# EAGLE board Project1 (EAGLE 9.3.0)
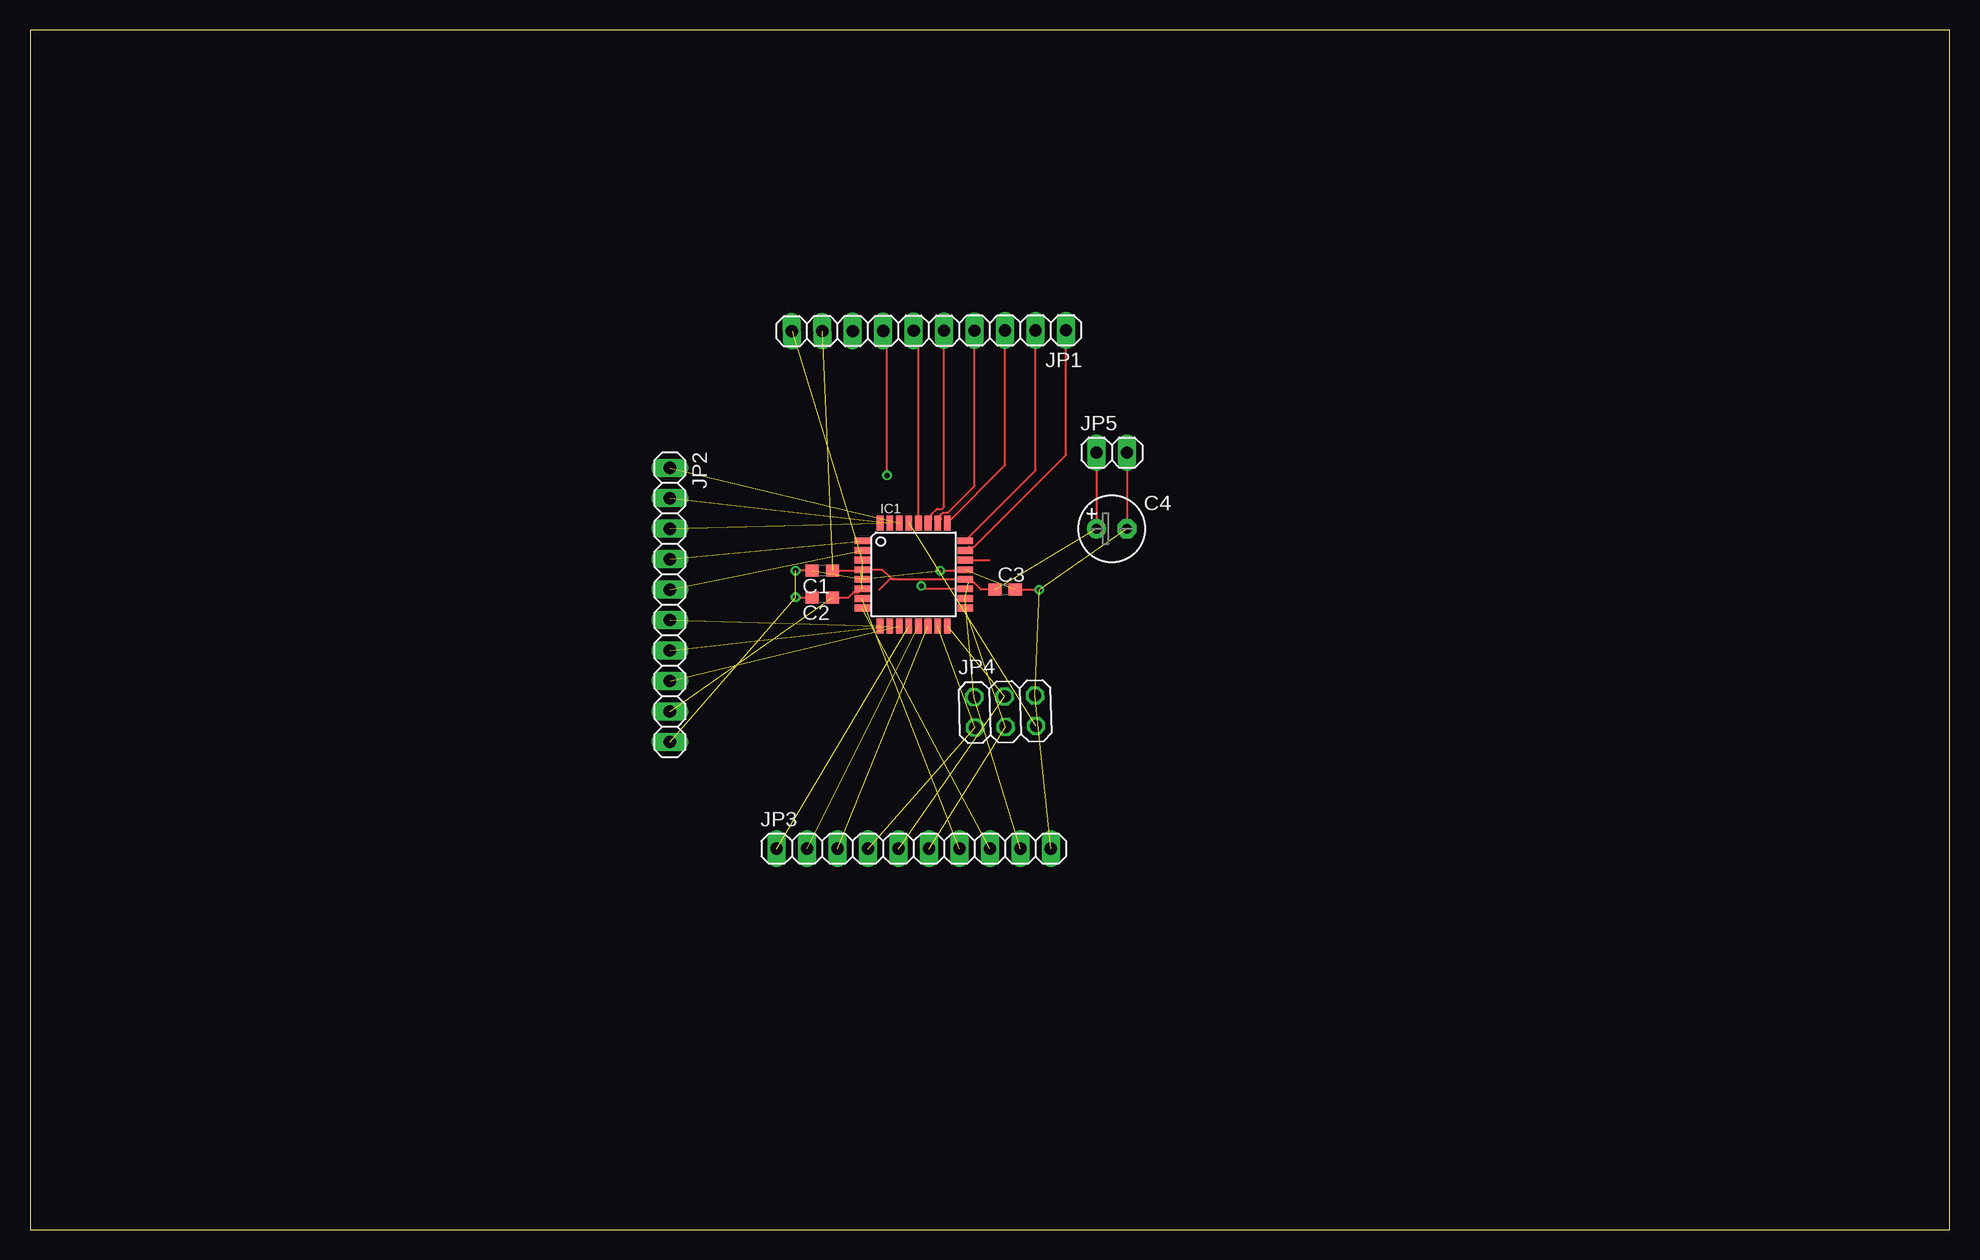
[diagram p0: board, top side]
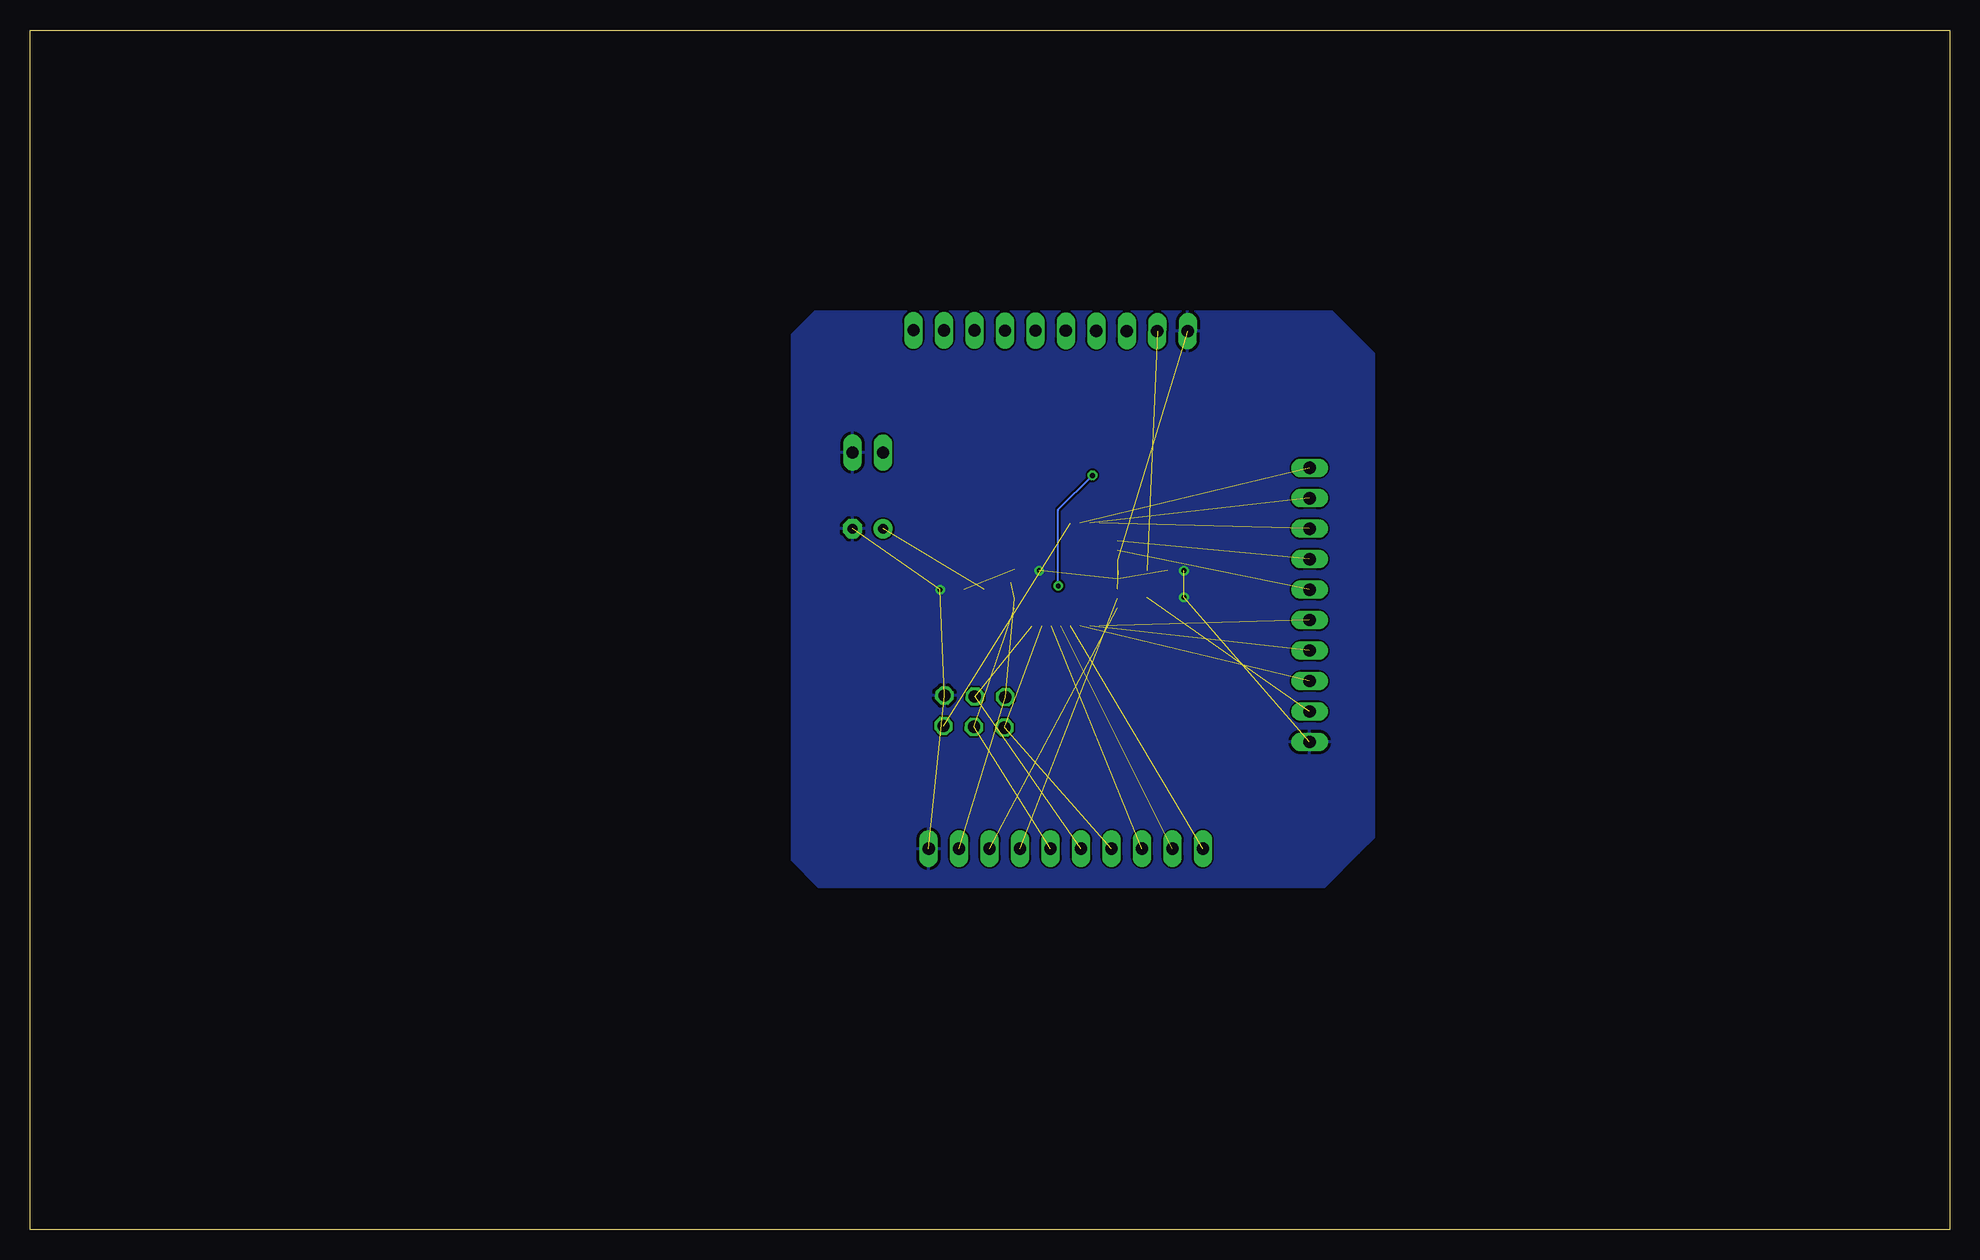
[diagram p1: board, bottom side, seen from below]

Size 160 x 100 mm. Coordinates in mm from the lower left corner, seen from the top.
Outline: 0,0 160,0 160,100 0,100 0,0
Copper layers (1*16): Top 0.035mm / dielectric 1.5mm / Bottom 0.035mm
Design rules "default": minimum track width 6mil, minimum drill 0.35mm, track to track 6mil, track to pad 6mil, pad to pad 6mil, via to via 6mil, smd to smd 6mil, copper to edge 40mil, drill to drill 6mil, minimum pad ring 10mil, minimum via ring 8mil, stop-mask expansion 4mil, vias tented up to drill 0mil, thermal gap 10mil

## Footprints (pad centres in the part's own frame; a part is rotated, then mirrored left to right if it is on the bottom)
C0603 = smd 1.1 x 1: 1 -0.85,0; 2 0.85,0
E2,5-6 = drill 0.813 pad 1.6: + -1.27,0 | drill 0.813 pad 1.6 octagon: - 1.27,0
TQFP32-08 = smd 1.27 x 0.559: 1 -4.293,2.8; 2 -4.293,2; 3 -4.293,1.2; 4 -4.293,0.4; 5 -4.293,-0.4; 6 -4.293,-1.2; 7 -4.293,-2; 8 -4.293,-2.8; 17 4.293,-2.8; 18 4.293,-2; 19 4.293,-1.2; 20 4.293,-0.4; 21 4.293,0.4; 22 4.293,1.2; 23 4.293,2; 24 4.293,2.8 | smd 0.559 x 1.27: 9 -2.8,-4.293; 10 -2,-4.293; 11 -1.2,-4.293; 12 -0.4,-4.293; 13 0.4,-4.293; 14 1.2,-4.293; 15 2,-4.293; 16 2.8,-4.293; 25 2.8,4.293; 26 2,4.293; 27 1.2,4.293; 28 0.4,4.293; 29 -0.4,4.293; 30 -1.2,4.293; 31 -2,4.293; 32 -2.8,4.293
1X10 = drill 1.016 long: 1 -11.43,0; 2 -8.89,0; 3 -6.35,0; 4 -3.81,0; 5 -1.27,0; 6 1.27,0; 7 3.81,0; 8 6.35,0; 9 8.89,0; 10 11.43,0
2X03 = drill 1.016 octagon: 1 -2.54,-1.27; 2 -2.54,1.27; 3 0,-1.27; 4 0,1.27; 5 2.54,-1.27; 6 2.54,1.27
1X02 = drill 1.016 long: 1 -1.27,0; 2 1.27,0

## Placement (x,y rotation side)
C1  100nF  [C0603]  66.04,54.93 180 top
C2  100nF  [C0603]  66.04,52.7 180 top
C3  100nF  [C0603]  81.28,53.34 0 top
C4  47uF  [E2,5-6]  90.17,58.42 0 top
IC1  MEGA8-AI  [TQFP32-08]  73.66,54.61 0 top
JP1  [1X10]  74.93,74.93 180.2 top
JP2  [1X10]  53.34,52.07 270 top
JP3  [1X10]  73.66,31.75 0 top
JP4  [2X03]  81.28,43.18 1.6 top
JP5  [1X02]  90.17,64.77 0 top

## Library data of the parts
C1-C4 = rcl; SPICEPREFIX: C
IC1 = atmel; MPN: ATMEGA8-16AU; OC_FARNELL: 9171371; OC_NEWARK: 73M8863
JP1-JP5 = pinhead

## Nets
GND: C1.2 C2.2 C3.2 C4.- IC1.3 IC1.5 IC1.21 JP1.10 JP2.10 JP3.10 JP4.6 JP5.2
N$1: IC1.23 JP1.1
N$2: IC1.24 JP1.2
N$3: IC1.25 JP1.3
N$4: IC1.26 JP1.4
N$5: IC1.27 JP1.5
N$6: IC1.28 JP1.6
N$7: IC1.19 JP1.7
N$9: IC1.22
PB0: IC1.12 JP3.1
PB1: IC1.13 JP3.2
PB2: IC1.14 JP3.3
PB3: IC1.15 JP3.4 JP4.1
PB4: IC1.16 JP3.5 JP4.4
PB5: IC1.17 JP3.6 JP4.3
PB6: IC1.7 JP3.7
PB7: IC1.8 JP3.8
PD0: IC1.30 JP2.1
PD1: IC1.31 JP2.2
PD2: IC1.32 JP2.3
PD3: IC1.1 JP2.4
PD4: IC1.2 JP2.5
PD5: IC1.9 JP2.6
PD6: IC1.10 JP2.7
PD7: IC1.11 JP2.8
RESET: IC1.29 JP4.5
VCC: C1.1 C2.1 C3.1 C4.+ IC1.4 IC1.6 IC1.18 IC1.20 JP1.9 JP2.9 JP3.9 JP4.2 JP5.1

## Tracks (layer width: path | path; a pad name or v marks a point on that pad's centre or on a via)
GND  (via drill 0.4)  (10 unrouted)
  Top 0.152: C1.2 v63.82,54.93 | JP5.2 C4.- | v63.82,52.7 C2.2 | v75.88,54.93 77.87,54.93 IC1.21 | C3.2 v84.14,53.34
  pour Bottom: 63.82,76.52 94.61,76.52 96.52,74.61 96.52,73.98 96.52,30.8 94.3,28.57 52.07,28.57 49.21,31.43 47.94,32.7 47.94,73.03 51.44,76.52 64.45,76.52
N$1
  Top 0.152: IC1.23 78.25,56.9 78.68,56.9 86.36,64.58 JP1.1
N$2
  Top 0.152: IC1.24 83.82,63.28 JP1.2
N$3
  Top 0.152: IC1.25 81.28,63.72 JP1.3
N$4
  Top 0.152: JP1.4 78.74,61.98 76.52,59.77 76.09,59.77 75.95,59.63 75.95,59.2 IC1.26
N$5
  Top 0.152: IC1.27 75.15,59.2 75.15,59.63 75.59,60.07 76.03,60.07 76.2,60.24 JP1.5 | JP1.5
N$6
  Top 0.152: IC1.28 74.06,74.53 JP1.6
N$7  (via drill 0.4)
  Top 0.152: IC1.19 74.54,53.41 v74.3,53.66 | v71.44,62.87 71.44,74.6 JP1.7
  Bottom 0.152: v74.3,53.66 74.3,60.01 v71.44,62.87
N$9
  Top 0.152: IC1.22 79.94,55.81
N$10
  Top 0.152: 68.58,73.98 68.9,74.3
PB0  (1 unrouted)
PB1  (1 unrouted)
PB2  (1 unrouted)
PB3  (2 unrouted)
PB4  (2 unrouted)
PB5  (2 unrouted)
PB6  (1 unrouted)
PB7  (1 unrouted)
PD0  (1 unrouted)
PD1  (1 unrouted)
PD2  (1 unrouted)
PD3  (1 unrouted)
PD4  (1 unrouted)
PD5  (1 unrouted)
PD6  (1 unrouted)
PD7  (1 unrouted)
RESET  (1 unrouted)
VCC  (7 unrouted)
  Top 0.152: JP5.1 C4.+ | C1.1 69.28,54.93 IC1.4 71.04,55.01 71.75,54.29 71.84,54.21 72.07,54.21 | IC1.6 69.08,53.12 68.64,53.12 68.22,52.7 C2.1 | C3.1 79.26,53.34 78.68,53.92 78.25,53.92 IC1.20 72.07,54.21 | 72.07,54.21 | 72.07,54.21 71.67,54.21 70.8,53.34